# Altium PCB m2m.PcbDoc
Units mm, origin at the board's own origin, x right, y up, seen from the top; angles counter-clockwise.
Board outline 82.79 x 56.74 mm, 2 copper layers (Top Layer, Bottom Layer); 27 components, 173 nets, 204 pads, 0 vias.
Unrouted connection lines stored in the file: 53.
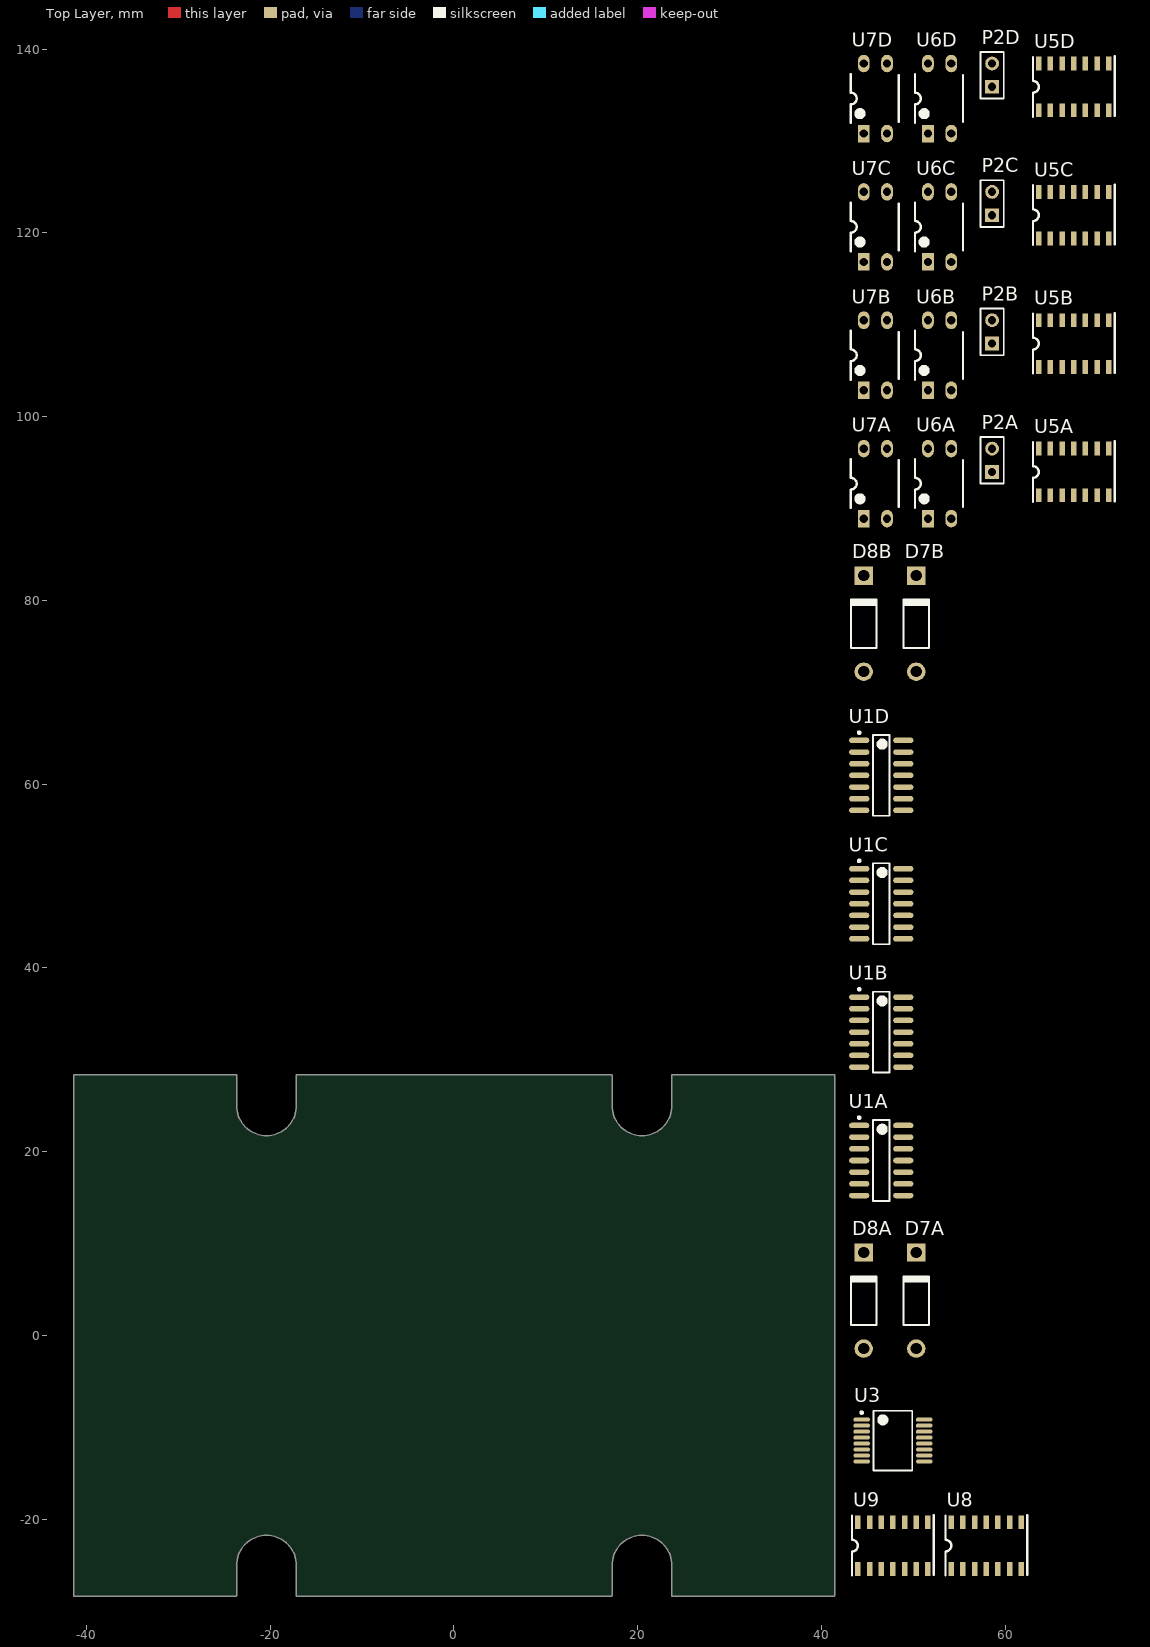
[diagram p0: Top Layer view]
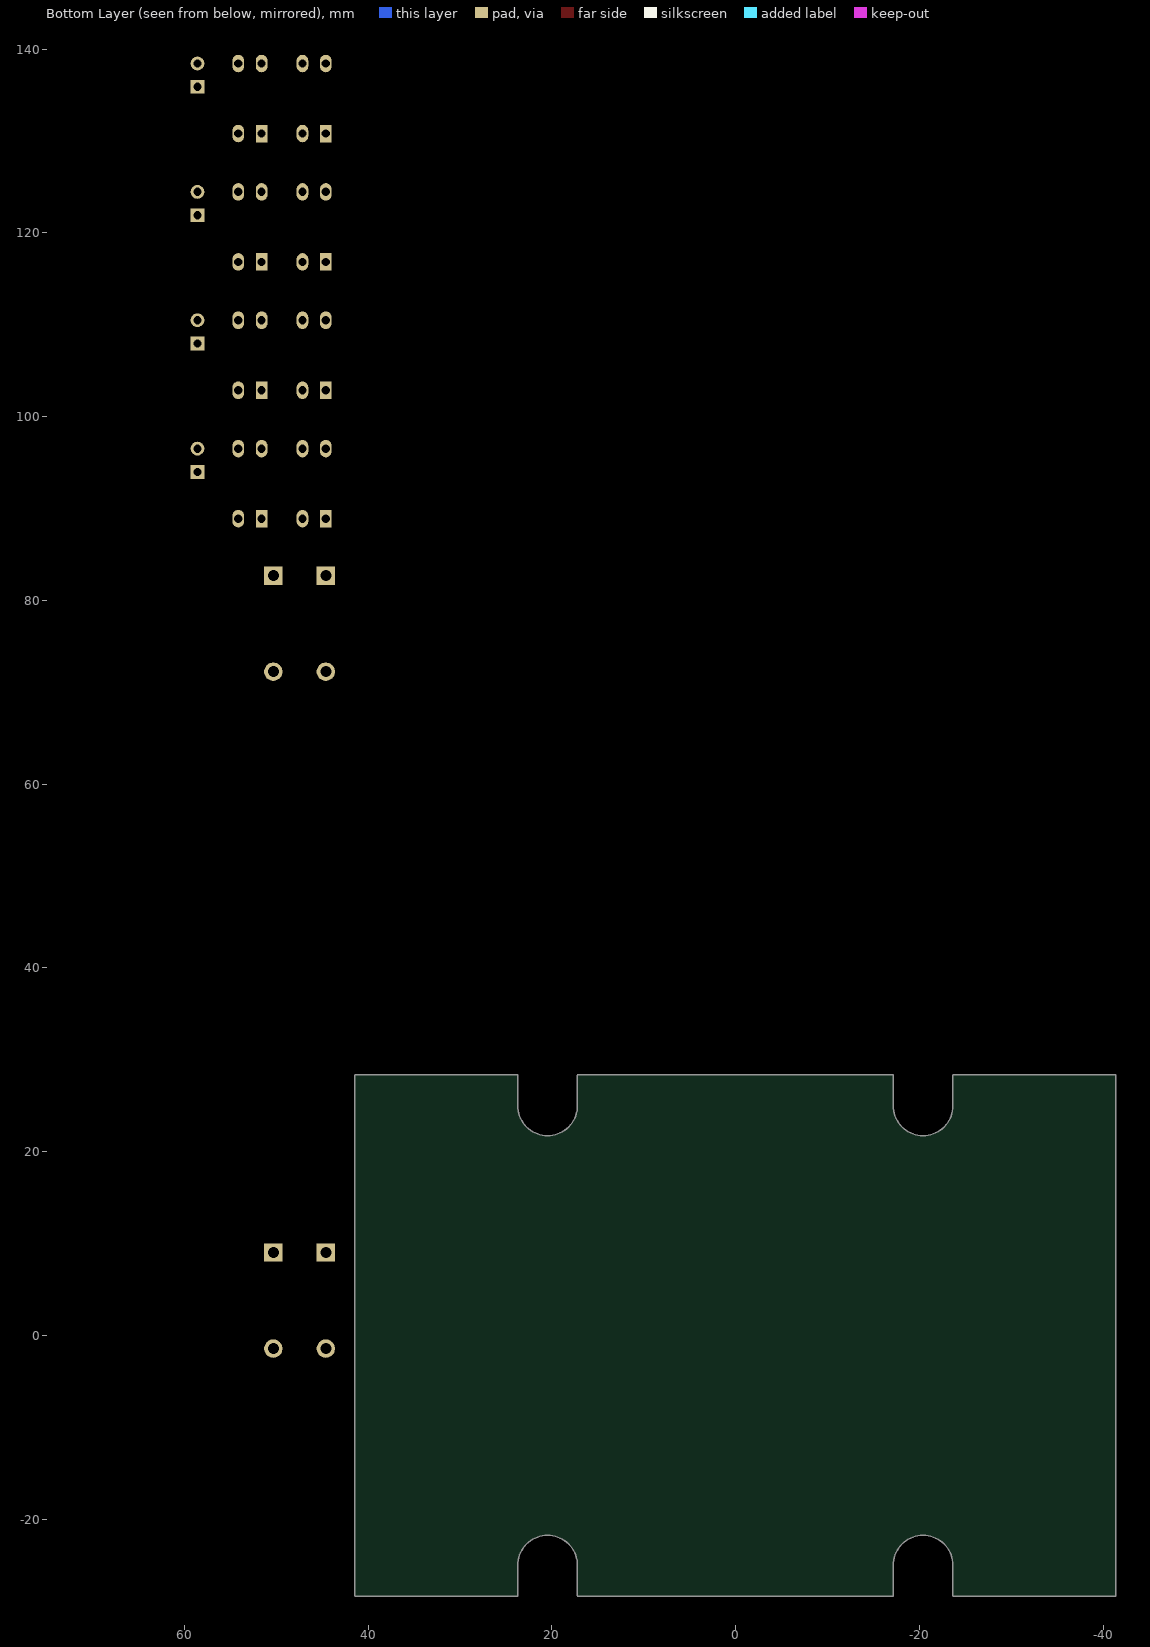
[diagram p1: Bottom Layer view, seen from below]

## Layer stack, top to bottom
Top Layer: signal copper 0.0356
Dielectric: dielectric 0.32, FR-4, Dk 4.8
Bottom Layer: signal copper 0.0356

## Board outline
-41.295,-28.361 cw(c-41.295,-28.297) -41.359,-28.297 -41.359,28.314 cw(c-41.295,28.314) -41.295,28.378 -23.711,28.378 cw(c-23.711,28.314) -23.647,28.314 -23.647,25.008 ccw(c-20.395,25.008) -17.143,25.008 cw(c-17.079,25.008) -17.143,25.008 -17.143,28.314 cw(c-17.079,28.314) -17.079,28.378 17.151,28.378 cw(c17.151,28.314) 17.215,28.314 17.215,25.008 cw(c17.151,25.008) 17.215,25.008 cw(c20.467,25.008) 17.215,25.008 ccw(c20.467,25.008) 20.467,21.756 ccw(c20.467,25.008) 20.468,21.756 ccw(c20.467,25.008) 23.719,25.008 23.719,28.314 cw(c23.783,28.314) 23.783,28.378 41.367,28.378 cw(c41.367,28.314) 41.431,28.314 41.431,-28.297 cw(c41.367,-28.297) 41.367,-28.361 23.783,-28.361 cw(c23.783,-28.297) 23.719,-28.297 23.719,-24.992 ccw(c20.467,-24.992) 17.215,-24.991 cw(c17.151,-24.992) 17.215,-24.992 17.215,-28.297 cw(c17.151,-28.297) 17.151,-28.361 -17.079,-28.361 cw(c-17.079,-28.297) -17.143,-28.297 -17.143,-24.992 cw(c-17.079,-24.992) -17.143,-24.991 cw(c-20.395,-24.992) -17.143,-24.992 -17.143,-24.991 ccw(c-20.395,-24.992) -23.647,-24.992 -23.647,-28.297 cw(c-23.711,-28.297) -23.711,-28.361

## Design rules (kind name [scope] priority, off if disabled: settings)
Clearance [All] p1: gap=0.254
PolygonConnect [All] p1: connectstyle=Relief reliefconductorwidth=0.254 reliefentries=4 polygonreliefangle="90 Angle" airgapwidth=0.254
RoomDefinition "U_USB-UART (FTDI FT230XS)" [InComponentClass('U_USB-UART (FTDI FT230XS)')] p1: confinementstyle=ConfineIn formatcopy=TRUE lockcomponents=FALSE outline 42.697,-15.24 52.857,-15.24 52.857,-5.08 42.697,-5.08
RoomDefinition U_PSU_DRIVE [InComponentClass('U_PSU_DRIVE')] p2: confinementstyle=ConfineIn formatcopy=TRUE lockcomponents=FALSE outline 42.697,-26.67 63.017,-26.67 63.017,-16.51 42.697,-16.51
RoomDefinition U_MICROANDVREF4 [InComponentClass('U_MICROANDVREF4')] p3: confinementstyle=ConfineIn formatcopy=TRUE lockcomponents=FALSE outline 42.697,129.54 72.542,129.54 72.542,142.875 42.697,142.875
RoomDefinition U_MICROANDVREF3 [InComponentClass('U_MICROANDVREF3')] p4: confinementstyle=ConfineIn formatcopy=TRUE lockcomponents=FALSE outline 42.697,115.57 72.542,115.57 72.542,128.905 42.697,128.905
RoomDefinition U_MICROANDVREF2 [InComponentClass('U_MICROANDVREF2')] p5: confinementstyle=ConfineIn formatcopy=TRUE lockcomponents=FALSE outline 42.697,101.6 72.542,101.6 72.542,114.935 42.697,114.935
RoomDefinition U_MICROANDVREF1 [InComponentClass('U_MICROANDVREF1')] p6: confinementstyle=ConfineIn formatcopy=TRUE lockcomponents=FALSE outline 42.697,87.63 72.542,87.63 72.542,100.965 42.697,100.965
RoomDefinition "U_ISOLATED PSU" [InComponentClass('U_ISOLATED PSU')] p7: confinementstyle=ConfineIn formatcopy=TRUE lockcomponents=FALSE outline 42.697,70.485 54.127,70.485 54.127,86.995 42.697,86.995
RoomDefinition U_ANALOGCHANNEL4 [InComponentClass('U_ANALOGCHANNEL4')] p8: confinementstyle=ConfineIn formatcopy=TRUE lockcomponents=FALSE outline 42.062,55.88 50.952,55.88 50.952,68.58 42.062,68.58
RoomDefinition U_ANALOGCHANNEL3 [InComponentClass('U_ANALOGCHANNEL3')] p9: confinementstyle=ConfineIn formatcopy=TRUE lockcomponents=FALSE outline 42.062,41.91 50.952,41.91 50.952,54.61 42.062,54.61
RoomDefinition U_ANALOGCHANNEL2 [InComponentClass('U_ANALOGCHANNEL2')] p10: confinementstyle=ConfineIn formatcopy=TRUE lockcomponents=FALSE outline 42.062,27.94 50.952,27.94 50.952,40.64 42.062,40.64
RoomDefinition U_ANALOGCHANNEL1 [InComponentClass('U_ANALOGCHANNEL1')] p11: confinementstyle=ConfineIn formatcopy=TRUE lockcomponents=FALSE outline 42.062,13.97 50.952,13.97 50.952,26.67 42.062,26.67
RoomDefinition "REPEAT(U_ISOLATED PSU,1.4)" [InComponentClass('REPEAT(U_ISOLATED PSU,1.4)')] p12: confinementstyle=ConfineIn formatcopy=TRUE lockcomponents=FALSE outline 42.697,-3.175 54.127,-3.175 54.127,13.335 42.697,13.335
RoomDefinition Multi2Meter [InComponentClass('Multi2Meter')] p13: confinementstyle=ConfineIn formatcopy=TRUE lockcomponents=FALSE outline -102.718,-101.6 -51.918,-101.6 -51.918,-76.2 -102.718,-76.2
RoutingVias [All] p1: holewidth=0.711 width=1.27 viastyle="Through Hole" minholewidth=0.711 minwidth=1.27 maxholewidth=0.711 maxwidth=1.27
SilkToSolderMaskClearance SilkscreenOverComponentPads [IsPad] p1: minsilkscreentomaskgap=0.254 clearancetoexposedcopper=TRUE
SolderMaskExpansion [All] p1: expansion=0.102
Width [All] p1: maxlimit=0.254 minlimit=0.254 preferedwidth=0.254
27 further rules are at their usual default settings.

## Classes and differential pairs
channel class "MICRO AND VREF": U_MICROANDVREF1 U_MICROANDVREF2 U_MICROANDVREF3 U_MICROANDVREF4
channel class "ISOLATED PSU": "REPEAT(U_ISOLATED PSU,1.4)" "U_ISOLATED PSU"
net class SINK_[1..4]: SINK_1 SINK_2 SINK_3 SINK_4
net class DRIVE_[1..4]: DRIVE_1 DRIVE_2 DRIVE_3 DRIVE_4
component class U_PSU_DRIVE: C18 R23 U8 U9
component class U_MICROANDVREF4: C15D C16D C17D ICSP1D P2D R17D R18D R19D R20D R21D R22D U4D U5D U6D U7D Y1D
component class U_MICROANDVREF3: C15C C16C C17C ICSP1C P2C R17C R18C R19C R20C R21C R22C U4C U5C U6C U7C Y1C
component class U_MICROANDVREF2: C15B C16B C17B ICSP1B P2B R17B R18B R19B R20B R21B R22B U4B U5B U6B U7B Y1B
component class U_MICROANDVREF1: C15A C16A C17A ICSP1A P2A R17A R18A R19A R20A R21A R22A U4A U5A U6A U7A Y1A
component class "REPEAT(U_ISOLATED PSU,1.4)": C10A C11A C12A C13A C14A D7A D8A D9A Q1A R15A R16A
component class U_ANALOGCHANNEL1: U1A
component class U_ANALOGCHANNEL2: U1B
component class U_ANALOGCHANNEL3: U1C
component class U_ANALOGCHANNEL4: U1D
component class "U_ISOLATED PSU": D7B D8B
component class "U_USB-UART (FTDI FT230XS)": U3
channel class "ANALOG CHANNEL": U_ANALOGCHANNEL1 U_ANALOGCHANNEL2 U_ANALOGCHANNEL3 U_ANALOGCHANNEL4

## Components (designator, comment, footprint, x,y, rotation, side; value= is the part's Value field where it differs from the comment)
D7A "1N5817" DO-41 50.317,3.81 r90 top (schematic designator D7)
D7B "1N5817" DO-41 50.317,77.47 r90 top (schematic designator D7)
D8A "1N5817" DO-41 44.602,3.81 r90 top (schematic designator D8)
D8B "1N5817" DO-41 44.602,77.47 r90 top (schematic designator D8)
P2A "TEST" HDR1X2 58.572,93.98 r90 top (schematic designator P2)
P2B "TEST" HDR1X2 58.572,107.95 r90 top (schematic designator P2)
P2C "TEST" HDR1X2 58.572,121.92 r90 top (schematic designator P2)
P2D "TEST" HDR1X2 58.572,135.89 r90 top (schematic designator P2)
U1A "74HC4066" D014_N 46.507,19.05 r0 top (schematic designator U1)
U1B "74HC4066" D014_N 46.507,33.02 r0 top (schematic designator U1)
U1C "74HC4066" D014_N 46.507,46.99 r0 top (schematic designator U1)
U1D "74HC4066" D014_N 46.507,60.96 r0 top (schematic designator U1)
U3 "FT230XS" SSOP16_L 47.777,-11.43 r0 top
U5A "PIC16F1823-I/SL" SOIC-14 67.462,93.98 r0 top (schematic designator U5)
U5B "PIC16F1823-I/SL" SOIC-14 67.462,107.95 r0 top (schematic designator U5)
U5C "PIC16F1823-I/SL" SOIC-14 67.462,121.92 r0 top (schematic designator U5)
U5D "PIC16F1823-I/SL" SOIC-14 67.462,135.89 r0 top (schematic designator U5)
U6A "OPTO FL817" DIP_4 52.857,92.71 r90 top (schematic designator U6)
U6B "OPTO FL817" DIP_4 52.857,106.68 r90 top (schematic designator U6)
U6C "OPTO FL817" DIP_4 52.857,120.65 r90 top (schematic designator U6)
U6D "OPTO FL817" DIP_4 52.857,134.62 r90 top (schematic designator U6)
U7A "OPTO FL817" DIP_4 45.872,92.71 r90 top (schematic designator U7)
U7B "OPTO FL817" DIP_4 45.872,106.68 r90 top (schematic designator U7)
U7C "OPTO FL817" DIP_4 45.872,120.65 r90 top (schematic designator U7)
U7D "OPTO FL817" DIP_4 45.872,134.62 r90 top (schematic designator U7)
U8 "SN74AHC04D" SOIC-14 57.937,-22.86 r0 top
U9 "SN74AHC04D" SOIC-14 47.777,-22.86 r0 top

## Footprints (in the part's own frame and the unit in brackets; to place one, negate y for a bottom-side part, rotate by r counter-clockwise, add the part's x,y. Pads: shape width x height; smd on the part's side, far side on the other; paste and mask are expansions set on the pad)
D014_N [mm] "SOIC, 14-Leads, Body 8.7x3.9mm, Pitch 1.27mm, IPC Medium Density"
  oval 2.2x0.6 smd: 1(-2.4,3.81) 2(-2.4,2.54) 3(-2.4,1.27) 4(-2.4,0) 5(-2.4,-1.27) 6(-2.4,-2.54) 7(-2.4,-3.81) 8(2.4,-3.81) 9(2.4,-2.54) 10(2.4,-1.27) 11(2.4,0) 12(2.4,1.27) 13(2.4,2.54) 14(2.4,3.81)
  silkscreen extent -2.52,-4.4 0.9,4.78, body extent -2,-4.38 2,4.38, height 1.75
DIP_4 [mm]
  rect 1.905x1.27 hole 0.9: 1(-3.81,1.27)
  oval 1.905x1.27 hole 0.9: 2(-3.81,-1.27) 3(3.81,-1.27) 4(3.81,1.27)
  silkscreen extent -2.65,-2.54 2.65,2.68, body extent -4,-2.92 4,2.62, height 4.31
DO-41 [mm] "Diode, Axial; Body 5.2 x 2.7 mm (LxDia. max), Lead Dia. 0.86 mm (max)"
  round 2 hole 1.2: 1(-5.23,0)
  rect 2x2 hole 1.2: 2(5.23,0)
  silkscreen extent -2.65,-1.4 2.75,1.4
HDR1X2 [mm] "Connector; Header; 2 Position"
  rect 1.5x1.5 hole 0.9: 1(0,0)
  round 1.5 hole 0.9: 2(2.54,0)
  silkscreen extent -1.27,-1.27 3.81,1.27
SOIC-14 [mm] "SOIC-14  NARROW BODY"
  rect 0.6x1.5 smd: 1(-3.81,-2.54) 2(-2.54,-2.54) 3(-1.27,-2.54) 4(0,-2.54) 5(1.27,-2.54) 6(2.54,-2.54) 7(3.81,-2.54) 8(3.81,2.54) 9(2.54,2.54) 10(1.27,2.54) 11(0,2.54) 12(-1.27,2.54) 13(-2.54,2.54) 14(-3.81,2.54)
  silkscreen extent -4.44,-3.25 4.44,3.33, body extent -4.37,-3 4.38,3, height 1.75
SSOP16_L [mm] "SOP, 16-Leads, Body 6.2x5.3mm, Pitch 0.65mm, IPC High Density"
  oval 1.8x0.45 smd: 1(-3.4,2.275) 2(-3.4,1.625) 3(-3.4,0.975) 4(-3.4,0.325) 5(-3.4,-0.325) 6(-3.4,-0.975) 7(-3.4,-1.625) 8(-3.4,-2.275) 9(3.4,-2.275) 10(3.4,-1.625) 11(3.4,-0.975) 12(3.4,-0.325) 13(3.4,0.325) 14(3.4,0.975) 15(3.4,1.625) 16(3.4,2.275)
  silkscreen extent -3.52,-3.25 2.1,3.25, body extent -2.7,-3.25 2.7,3.25, height 2

## Part data
D7A D7B D8A D8B: library part "D Schottky", "Schottky Diode"
P2A P2B P2C P2D: library part "Header 2", "Header, 2-Pin"
U1A U1B U1C U1D: "Quadruple Bilateral Analog Switch"
U3: library part "FTDI FT230XS", "FTDI FT230XS USB - UART"
U5A U5B U5C U5D: library part PIC16F1823
U6A U6B U6C U6D U7A U7B U7C U7D: library part FL817, "4-Pin Phototransistor Optocoupler"
U8 U9: "Hex Inverter"

## Nets (pads, with @x,y where several pads share a name; then routed paths per layer and width w, separated by ;. In a path a pad name is that pad's centre, name@x,y a point inside that pad or via, vN(x,y) a via of type N, cw(c..) or ccw(c..) an arc to the next point about the centre after c; other vN are vias at no path point)
3V3: U3.1 U3.8 U3.9
AMPS_IN_1A: 
AMPS_IN_1B: 
AMPS_IN_1C: 
AMPS_IN_1D: 
CBUS_0: U3.12
CHANNEL_SAMPLEA: U5A.11
CHANNEL_SAMPLEB: U5B.11
CHANNEL_SAMPLEC: U5C.11
CHANNEL_SAMPLED: U5D.11
DRIVE_1: U8.2
DRIVE_2: U8.10
DRIVE_3: U9.2
DRIVE_4: U9.10
GND: U3.3 U3.13 U7A.3 U7B.3 U7C.3 U7D.3 U8.7 U9.7
I_SAMPLEA: U1A.11
I_SAMPLEB: U1B.11
I_SAMPLEC: U1C.11
I_SAMPLED: U1D.11
I_SELECTA: U5A.8
I_SELECTB: U5B.8
I_SELECTC: U5C.8
I_SELECTD: U1D.12
ICSP_CLCKA: U5A.12
ICSP_CLCKB: U5B.12
ICSP_CLCKC: U5C.12
ICSP_CLCKD: U5D.12
ICSP_DATAA: U5A.13
ICSP_DATAB: U5B.13
ICSP_DATAC: U5C.13
ICSP_DATAD: U5D.13
ICSP_VPPA: U5A.4
ICSP_VPPB: U5B.4
ICSP_VPPC: U5C.4
ICSP_VPPD: U5D.4
K_010A: U1A.5 U5A.10
K_010B: U5B.10
K_010C: U5C.10
K_010D: U5D.10
K_100A: U1A.6 U5A.9
K_100B: U5B.9
K_100C: U5C.9
K_100D: U5D.9
NetBEAD1_2: U3.10
NetC10A_1: 
NetC10A_2: D7A.1 D8A.2
NetC10B_1: 
NetC10B_2: D7B.1 D8B.2
NetC11A_1: D7A.2
NetC11A_2: D8A.1
NetC11B_1: D7B.2
NetC11B_2: D8B.1
NetC13A_2: 
NetC13B_2: 
NetC14A_1: 
NetC14B_1: 
NetC18_1: U8.3
NetD3A_1: 
NetD3A_2: 
NetD3B_1: 
NetD3B_2: 
NetD3C_1: 
NetD3C_2: 
NetD3D_1: 
NetD3D_2: 
NetD5_2: 
NetD6_2: 
NetD9A_2: 
NetD9B_2: 
NetR1A_2: 
NetR1B_2: 
NetR1C_2: 
NetR1D_2: 
NetR2A_1: U1A.3
NetR2B_1: U1B.3
NetR2C_1: U1C.3
NetR2D_1: U1D.3
NetR3A_1: U1A.9
NetR3B_1: U1B.9
NetR3C_1: U1C.9
NetR3D_1: U1D.9
NetR5A_2: 
NetR5B_2: 
NetR5C_2: 
NetR5D_2: 
NetR8A_2: 
NetR8B_2: 
NetR8C_2: 
NetR8D_2: 
NetR11_2: U3.6
NetR12_2: U3.7
NetR18A_1: 
NetR18B_1: 
NetR18B_2: 
NetR18C_1: 
NetR18C_2: 
NetR18D_1: 
NetR18D_2: 
NetR20A_1: 
NetR20A_2: U6A.2
NetR20B_2: U6B.2
NetR20C_2: U6C.2
NetR20D_2: U6D.2
NetR21A_2: U7A.4 U7B.4 U7C.4 U7D.4
NetR22A_1: U7A.2
NetR22B_1: U7B.2
NetR22C_1: U7C.2
NetR22D_1: U7D.2
NetR23_1: U8.1 U8.4 U8.5 U8.9
NetU8_8: U8.8 U8.11 U8.13 U9.3
NetU9_1: U9.1 U9.4 U9.5 U9.9
NetU9_8: U9.8 U9.11 U9.13
OSC1A: U5A.2
OSC1B: U5B.2
OSC1C: U5C.2
OSC1D: U5D.2
OSC2A: U5A.3
OSC2B: U5B.3
OSC2C: U5C.3
OSC2D: U5D.3
PWR_ENB: U3.14
RX_COMMON: U3.2
RX_TTLA: U5A.6 U6A.4
RX_TTLB: U5B.6 U6B.4
RX_TTLC: U5C.6 U6C.4
RX_TTLD: U5D.6 U6D.4
SAMPLEA: U1A.2 U1A.10
SAMPLEB: U1B.2 U1B.10
SAMPLEC: U1C.2 U1C.10
SAMPLED: U1D.2 U1D.10
SINK_1: U8.6
SINK_2: U8.12
SINK_3: U9.6
SINK_4: U9.12
TX_COMMON: U3.15
TX_TTLA: U5A.5
TX_TTLB: U5B.5
TX_TTLC: U5C.5
TX_TTLD: U5D.5
USB_D+: 
USB_D-: 
USB_RX_LED: U3.5
USB_TX_LED: U3.11
V2.048A: 
V2.048B: 
V2.048C: 
V2.048D: 
V(+)A: U5A.1 U7A.1
V(+)B: U5B.1 U7B.1
V(+)C: U1C.14
V(+)D: U1D.14
V(-)A: P2A.1 P2A.2 U5A.14 U6A.3
V(-)B: P2B.1 P2B.2 U5B.14 U6B.3
V(-)C: U1C.7
V(-)D: U1D.7
V_GNDA: U1A.4 U1A.8
V_GNDB: U1B.4 U1B.8
V_GNDC: U1C.4 U1C.8
V_GNDD: U1D.4 U1D.8
V_SELECTA: U1A.13 U5A.7
V_SELECTB: U1B.13
V_SELECTC: U1C.13
V_SELECTD: U1D.13
VCC: U6A.1 U6B.1 U6C.1 U6D.1 U8.14 U9.14
VGND: 
VOLTS_IN_1A: 
VOLTS_IN_1B: 
VOLTS_IN_1C: 
VOLTS_IN_1D: 
VTAPA: U1A.1
VTAPB: U1B.1
VTAPC: U1C.1
VTAPD: U1D.1
pads on no net: P2C.1 P2C.2 P2D.1 P2D.2 U1A.7 U1A.12 U1A.14 U1B.5 U1B.6 U1B.7 U1B.12 U1B.14 U1C.5 U1C.6 U1C.12 U1D.5 U1D.6 U3.4 U3.16 U5B.7 U5C.1 U5C.7 U5C.14 U5D.1 U5D.7 U5D.8 U5D.14 U6C.3 U6D.3 U7C.1 U7D.1